# Altium PCB Printer-Pi-Pro_PCB.pcbdoc
Units mil, origin at the board's own origin, x right, y up, seen from the top; angles counter-clockwise.
Board outline 3272.5 x 1815 mil, 2 copper layers (Top Layer, Bottom Layer); 14 components, 16 nets, 72 pads, 12 vias.
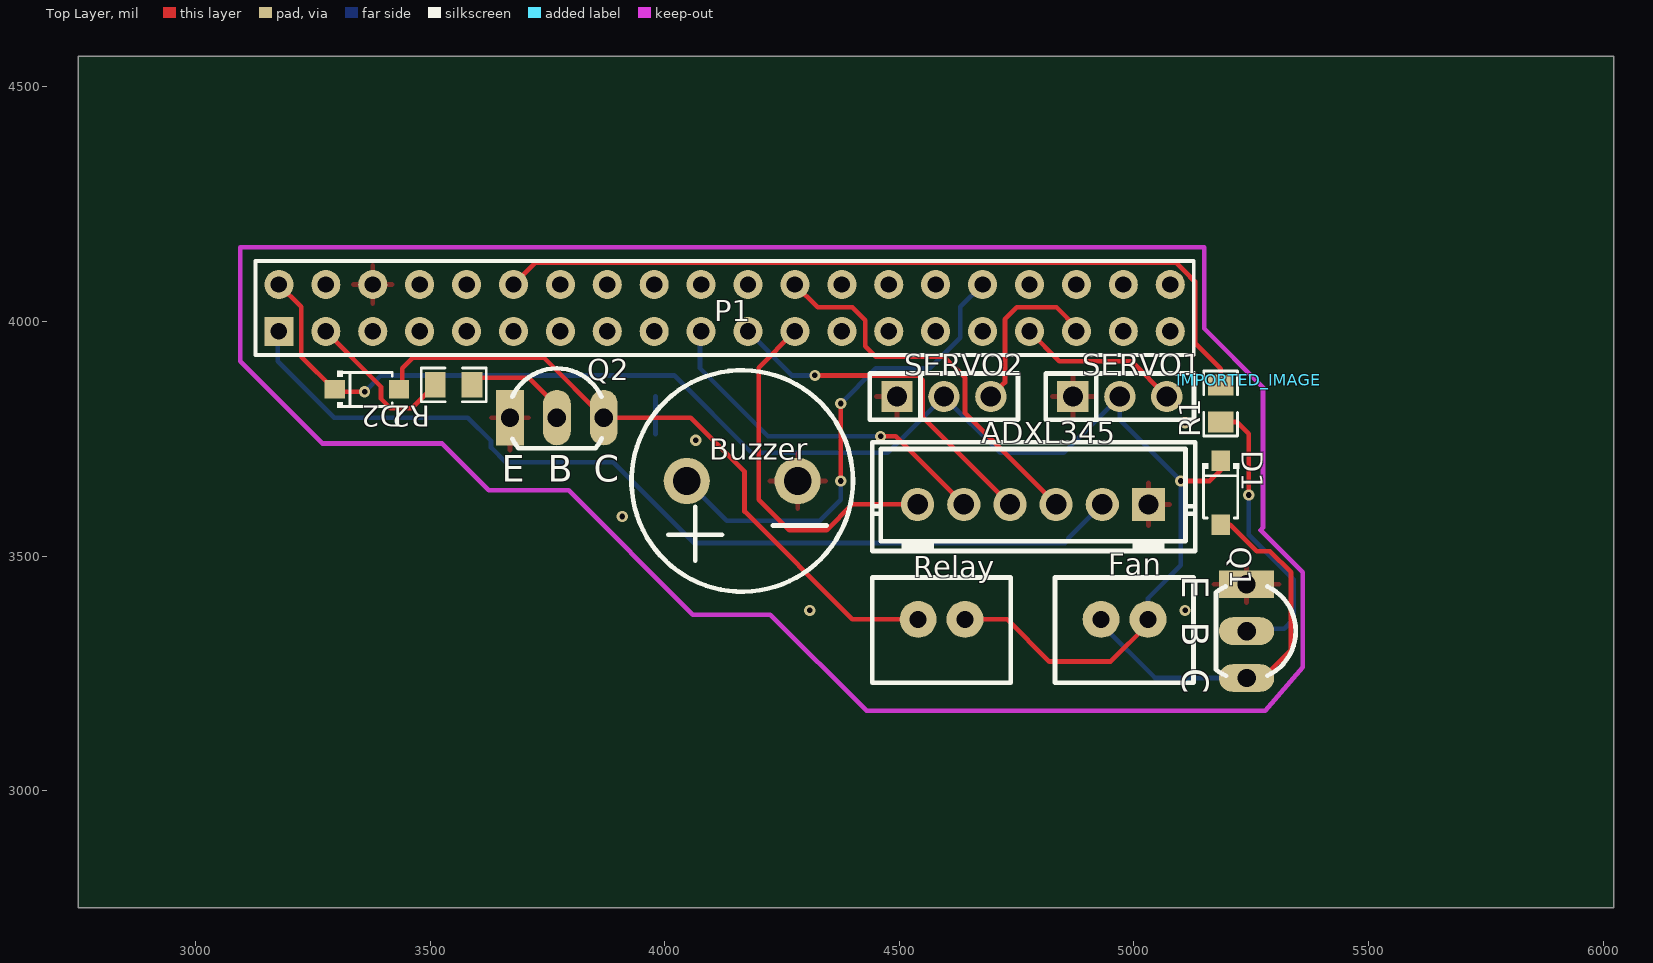
[diagram p0: Top Layer view]
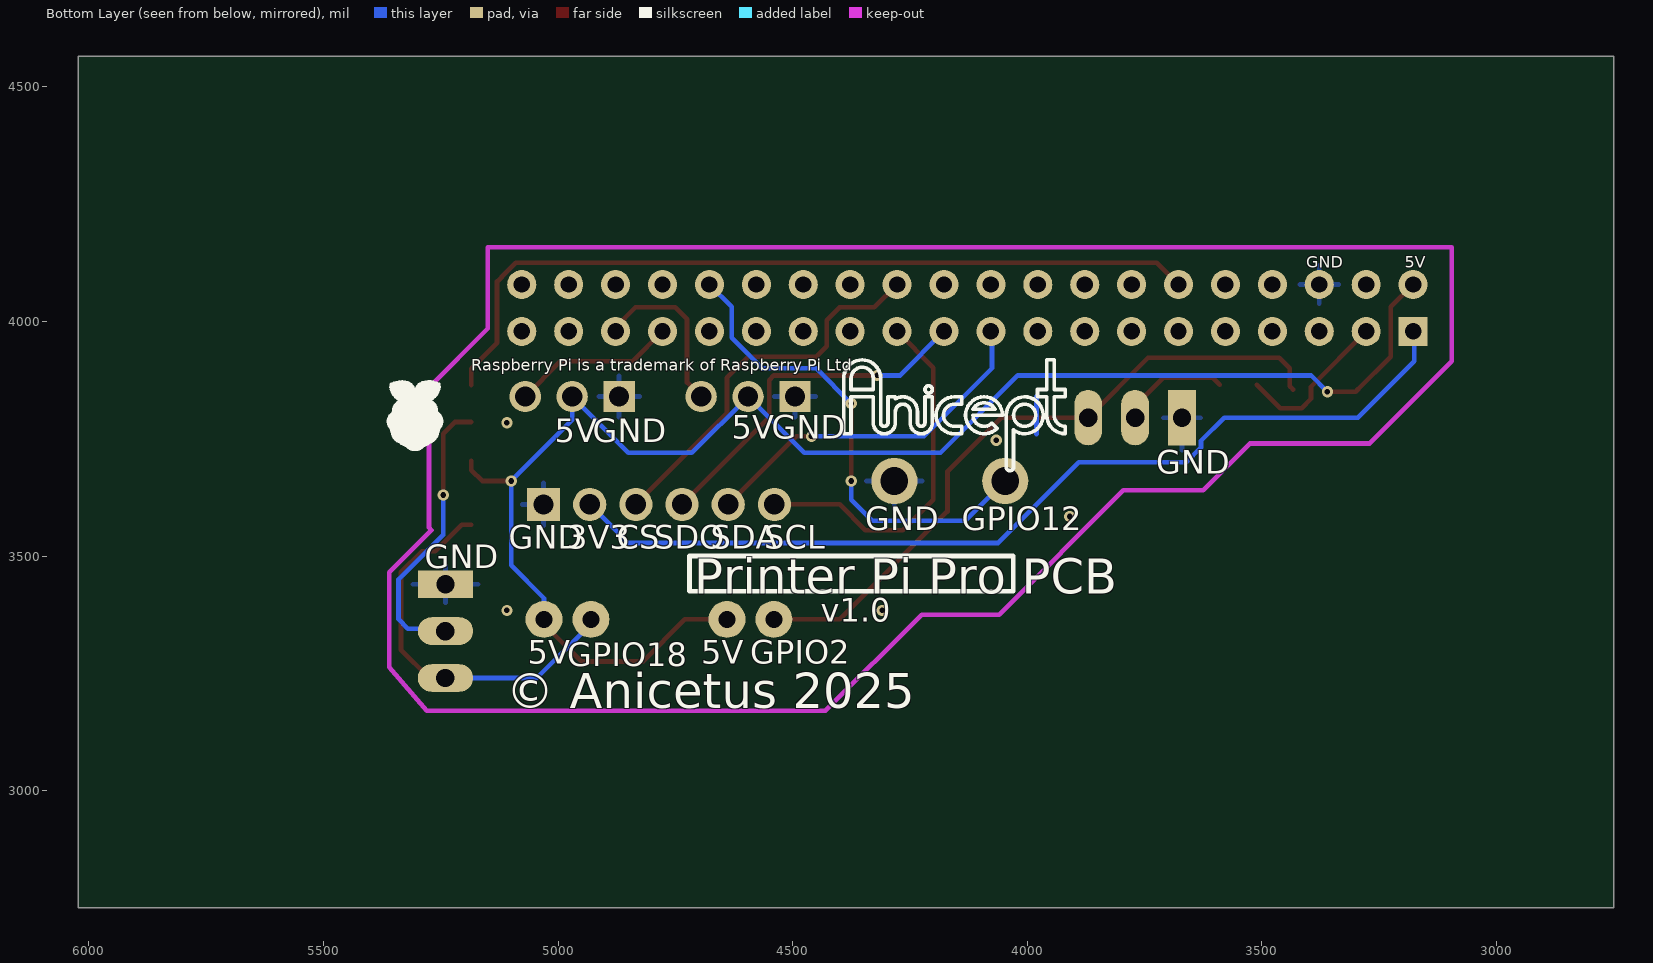
[diagram p1: Bottom Layer view, seen from below]

## Layer stack, top to bottom
Top Layer: signal copper (thickness not stored)
Dielectric: dielectric 12.6, FR-4, Dk 4.8
Bottom Layer: signal copper (thickness not stored)

## Board outline
6022.5,2750 2750,2750 2750,4565 6022.5,4565

## Design rules (kind name [scope] priority, off if disabled: settings)
BoardOutlineClearance copperThickness1oz [All] p0: genericclearance=10 ignorepadtopadclearanceinfootprint=FALSE except(0: Arc-SplitContinuation Track-SplitContinuation SMDPad-SplitContinuation THPad-SplitContinuation Via-SplitContinuation Fill-SplitContinuation Poly-SplitContinuation Region-SplitContinuation Text-SplitContinuation; 6: Track-CutoutEdge SMDPad-CutoutEdge THPad-CutoutEdge Via-CutoutEdge Region-CutoutEdge; 11.8: Track-OutlineEdge SMDPad-OutlineEdge THPad-OutlineEdge Via-OutlineEdge Fill-OutlineEdge Region-OutlineEdge Poly-OutlineEdge Text-OutlineEdge Fill-CutoutEdge)
BoardOutlineClearance copperThickness2oz [All] p0: genericclearance=10 ignorepadtopadclearanceinfootprint=FALSE except(0: Arc-SplitContinuation Track-SplitContinuation SMDPad-SplitContinuation THPad-SplitContinuation Via-SplitContinuation Fill-SplitContinuation Poly-SplitContinuation Region-SplitContinuation Text-SplitContinuation; 6: Track-CutoutEdge SMDPad-CutoutEdge THPad-CutoutEdge Via-CutoutEdge Region-CutoutEdge; 11.8: Track-OutlineEdge SMDPad-OutlineEdge THPad-OutlineEdge Via-OutlineEdge Fill-OutlineEdge Region-OutlineEdge Poly-OutlineEdge Text-OutlineEdge Fill-CutoutEdge)
Clearance copperThickness1oz [(InNet('GND') OR InNet('3V3') OR InNet('$1N1246') OR InNet('$1N1254') OR InNet('$1N1262') OR InNet('$1N1269') OR InNet('BUZZER') OR InNet('$1N1476') OR InNet('+5V') OR InNet('$1N1482') OR InNet('$1N673') OR InNet('$1N1043') OR InNet('RELAY_GPIO') OR InNet('FAN_PWM') OR InNet('$1N779') OR InNet('$1N1048'))] p1: gap=7 ignorepadtopadclearanceinfootprint=FALSE except(4: Track-Track; 6: Track-SMDPad SMDPad-SMDPad Track-THPad SMDPad-THPad THPad-THPad Track-Via SMDPad-Via THPad-Via Via-Via SMDPad-Fill THPad-Fill Via-Fill Fill-Fill Track-Region SMDPad-Region THPad-Region Via-Region Region-Region Track-Poly SMDPad-Poly THPad-Poly Via-Poly Fill-Poly Region-Poly Poly-Poly Track-Text SMDPad-Text THPad-Text Via-Text Fill-Text Region-Text Poly-Text Text-Text; 6.9: Track-Hole SMDPad-Hole THPad-Hole Via-Hole Fill-Hole Region-Hole Poly-Hole Text-Hole Sheet-Hole; 11.8: Track-Fill Fill-Region Track-Sheet SMDPad-Sheet THPad-Sheet Via-Sheet Fill-Sheet Region-Sheet Poly-Sheet Text-Sheet)
Clearance copperThickness2oz [All] p1: gap=7 ignorepadtopadclearanceinfootprint=FALSE except(6: Track-SMDPad SMDPad-SMDPad Track-THPad SMDPad-THPad THPad-THPad Track-Via SMDPad-Via THPad-Via Via-Via SMDPad-Fill THPad-Fill Via-Fill Fill-Fill Track-Region SMDPad-Region THPad-Region Via-Region Region-Region Track-Poly SMDPad-Poly THPad-Poly Via-Poly Fill-Poly Region-Poly Poly-Poly Track-Text SMDPad-Text THPad-Text Via-Text Fill-Text Region-Text Poly-Text Text-Text; 6.9: Track-Hole SMDPad-Hole THPad-Hole Via-Hole Fill-Hole Region-Hole Poly-Hole Text-Hole Sheet-Hole; 8: Track-Track; 11.8: Track-Fill Fill-Region Track-Sheet SMDPad-Sheet THPad-Sheet Via-Sheet Fill-Sheet Region-Sheet Poly-Sheet Text-Sheet)
DiffPairsRouting differentialPair [All] p1: maxuncoupledlength=10 minlimit=6 maxlimit=6 mostfreqgap=6 toplayer_minwidth=5 toplayer_prefwidth=10 toplayer_maxwidth=100 bottomlayer_minwidth=5 bottomlayer_prefwidth=10 bottomlayer_maxwidth=100
PasteMaskExpansion pasteMaskExpansion [All] p1: expansion=0
PlaneConnect innerPlane [All] p1: planeconnectstyle=Relief reliefexpansion=20 reliefentries=4 reliefconductorwidth=10 reliefairgap=10
PolygonConnect copperRegion [All] p1: connectstyle=Relief reliefentries=4 reliefconductorwidth=10 polygonreliefangle="90 Angle" airgapwidth=10
RoutingVias viaSize [All] p1: viastyle="Through Hole" holewidth=12.0078 minholewidth=11.811 maxholewidth=248.0314 width=24.0158 minwidth=19.685 maxwidth=393.7008
SolderMaskExpansion solderMaskExpansion [All] p1: useseparateexpansions=TRUE expansion=2 expansionbottom=2
Width copperThickness1oz [All] p1: maxlimit=100 minlimit=5 preferedwidth=10
Width copperThickness2oz [All] p1: maxlimit=100 minlimit=8 preferedwidth=10

## Components (designator, comment, footprint, x,y, rotation, side; value= is the part's Value field where it differs from the comment)
ADXL345 "B6B-XH-A-GU" CONN-TH_6P-P2.50_C9900020524 4785,3610 r0 top
Buzzer "YS-MBZ12085C05R42" BUZ-TH_BD12.0-P6.00-D0.9-RD 4165,3660 r180 top
D1 "1N4148W_C81598" SOD-123F_L2.7-W1.6-LS3.8-RD 5185,3635 r270 top
D2 "1N4148W_C81598" SOD-123F_L2.7-W1.6-LS3.8-RD 3365,3855 r0 top
Fan "B2B-XH-A(LF)(SN)" "JST-XH 2p" 5030,3365 r180 top
IMPORTED_IMAGE "IMPORTED_IMAGE" IMPORTED_IMAGE 5245,3875 r0 top
P1 "2.54-2*20" HDR-20X2/2.54 4077.39,4078.71 r0 top
Q1 "2N2222A_C5330385" 2N2222A 5240,3340 r270 top
Q2 "2N2222A_C5330385" 2N2222A 3770,3795 r0 top
R1 "ARG05FTC5000" R0805 5185,3825 r90 top
R2 "ARG05FTC5000" R0805 3550,3865 r180 top
Relay "B2B-XH-A(LF)(SN)" "JST-XH 2p" 4640,3365 r180 top
SERVO1 "PZ254V-11-03P" HDR-TH_203S-Y-1X03PG 4970,3840 r0 top
SERVO2 "PZ254V-11-03P" HDR-TH_203S-Y-1X03PG 4595,3840 r0 top

## Footprints (in the part's own frame and the unit in brackets; to place one, negate y for a bottom-side part, rotate by r counter-clockwise, add the part's x,y. Pads: shape width x height; smd on the part's side, far side on the other; paste and mask are expansions set on the pad)
2N2222A [mm]
  rect 1.5x3 hole 1: 1(-2.54,0)
  oval 1.5x3 hole 1: 2(0,0.001) 3(2.54,0.001)
  silkscreen extent -2.41,-1.65 2.42,2.67
BUZ-TH_BD12.0-P6.00-D0.9-RD [mm]
  round 2.5 hole 1.5: 1(-3,0) 2(3,0)
  silkscreen extent -5.99,-5.99 5.99,5.99
CONN-TH_6P-P2.50_C9900020524 [mm]
  rect 1.8x1.8 hole 1.1: 1(6.251,-0.001)
  round 1.8 hole 1.1: 2(3.749,0.001) 3(1.249,0.001) 4(-1.251,0.001) 5(-3.751,0.001) 6(-6.251,0.001)
  silkscreen extent -8.7,-2.52 8.79,3.37
HDR-20X2/2.54 [mil]
  rect 62x62 hole 35: 1(-900,-100)
  round 62 hole 35: 2(-900,0) 3(-800,-100) 4(-800,0) 5(-700,-100) 6(-700,0) 7(-600,-100) 8(-600,0) 9(-500,-100) 10(-500,0) 11(-400,-100) 12(-400,0) 13(-300,-100) 14(-300,0) 15(-200,-100) 16(-200,0) 17(-100,-100) 18(-100,0) 19(0,-100) 20(0,0) 21(100,-100) 22(100,0) 23(200,-100) 24(200,0) 25(300,-100) 26(300,0) 27(400,-100) 28(400,0) 29(500,-100) 30(500,0) 31(600,-100) 32(600,0) 33(700,-100) 34(700,0) 35(800,-100) 36(800,0) 37(900,-100) 38(900,0) 39(1000,-100) 40(1000,0)
  silkscreen extent -950,-150 1050,50
HDR-TH_203S-Y-1X03PG [mm]
  rect 1.7x1.7 hole 1.1: 1(-2.54,0)
  round 1.7 hole 1.1: 2(0,0) 3(2.54,0)
  silkscreen extent -4.01,-1.25 4.01,1.25
IMPORTED_IMAGE [mil]
"JST-XH 2p" [mm]
  round 2 hole 0.914: 1(0,0) 2(2.54,0)
  silkscreen extent -2.47,-2.27 5.03,3.43
R0805 [mm]
  rect 1.133x1.377 smd: 1(-1,0) 2(1,0)
  silkscreen extent -1.76,-0.92 1.76,0.92
SOD-123F_L2.7-W1.6-LS3.8-RD [mm]
  rect 1.1x1 smd: 1(-1.735,0) 2(1.735,0)
  silkscreen extent -1.6,-1 1.38,1

## Via types
v1: diameter 24.02, hole 12.01, Top Layer to Bottom Layer, 12 vias

## Nets (pads, with @x,y where several pads share a name; then routed paths per layer and width w, separated by ;. In a path a pad name is that pad's centre, name@x,y a point inside that pad or via, vN(x,y) a via of type N, cw(c..) or ccw(c..) an arc to the next point about the centre after c; other vN are vias at no path point)
3V3: ADXL345.2 P1.1 | length 2026.3
  Bottom Layer w10: P1.1 3175,3976.32 3175,3915 3295,3795 3580,3795 3629.49,3745.51 3629.49,3731.39 3660.87,3700 3890,3700 4062.07,3527.93 4852.93,3527.93 4860,3535 4860,3537.44 ADXL345.2
$1N673: D1.2 Fan.2 Q1.3 | length 834.6
  Top Layer w10: D1.2 5205,3566.7 5261.69,3510 5290,3510 5335,3465 5335,3300 5275,3240 Q1.3
  Bottom Layer w10: Fan.2@4930,3355 5045,3240 Q1.3
$1N779: Q1.2 R1.1 | length 615.7
  Top Layer w10: R1.1 5220,3785.63 5245,3760.63 v1(5245,3630)
  Bottom Layer w10: Q1.2 5245.02,3345 5320,3345 5340,3365 5340,3450 5245,3545 v1(5245,3630)
$1N1043: D2.2 Q2.3 Relay.2 | length 1437.8
  Top Layer w10: D2.2 3440,3861.7 3440,3900 3462.5,3922.5 3742.52,3922.5 Q2.3 4054.98,3795.02 4170,3680 4170,3595 4400,3365 Relay.2
$1N1048: Q2.2 R2.1 | length 236.7
  Top Layer w10: R2.1 3604.37,3880 3710,3880 3770,3820 Q2.2
$1N1246: ADXL345.3 P1.24 | length 827.5
  Top Layer w10: P1.24 4326.1,4030 4400,4030 4427.5,4002.5 4427.5,3947.5 4450,3925 4595,3925 4640,3880 4640,3804.2 ADXL345.3
$1N1254: ADXL345.4 P1.21 | length 757.5
  Top Layer w10: v1(4320,3885) 4540,3885 4550,3875 4550,3795.77 ADXL345.4
  Bottom Layer w10: P1.21 4271.1,3885 v1(4320,3885)
$1N1262: ADXL345.5 P1.19 | length 762.1
  Top Layer w10: v1(4460,3755) 4492.35,3755 ADXL345.5
  Bottom Layer w10: P1.19 4075,3976.32 4075,3900 4220,3755 v1(4460,3755)
$1N1269: ADXL345.6 P1.23 | length 779.4
  Top Layer w10: P1.23 4200,3901.32 4200,3620 4265,3555 4345,3555 4400.03,3610.03 ADXL345.6
$1N1476: P1.33 SERVO1.3 | length 350.1
  Top Layer w10: P1.33 4841.1,3915 4995,3915 SERVO1.3
$1N1482: P1.35 SERVO2.3 | length 366.6
  Top Layer w10: SERVO2.3 4725,3870 4725,4005 4750,4030 4835,4030 4877.39,3987.61 P1.35
+5V: D1.1 D2.1 Fan.1 P1.2 Relay.1 SERVO1.2 SERVO2.2 | length 3325.9
  Top Layer w10: P1.2 3225,4031.1 3225,3925 D2.1@3295,3855 ; D2.1 D2.1@3295,3855 ; v1(3360,3850) 3300,3850 D2.1@3295,3855 ; Relay.1 4730,3365 4820,3275 4950,3275 Fan.1@5030,3355 ; v1(5100,3660) 5161.69,3660 5185,3683.3 D1.1
  Bottom Layer w10: v1(3360,3850) 3395,3885 4020,3885 4184.8,3720.2 4475.2,3720.2 SERVO2.2 4715,3720 4850,3720 SERVO1.2 4970,3790 v1(5100,3660) 5100,3480 5030,3410 Fan.1@5030,3355
BUZZER: Buzzer.2 P1.32 | length 1033.3
  Top Layer w10: v1(4375,3660) v1(4375,3825)
  Bottom Layer w10: Buzzer.2 4131.89,3575 4330,3575 4375,3620 v1(4375,3660) ; v1(4375,3825) 4450,3900 4565,3900 4630,3965 4630,4031.32 P1.32
FAN_PWM: P1.12 R1.2 | length 1732
  Top Layer w10: P1.12 3723.68,4125 5090,4125 5094.31,4120.69 5094.78,4120.69 5119.37,4096.1 5119.37,4095.63 5130,4085 5130,3954.37 5185,3899.37 R1.2
GND: ADXL345.1 Buzzer.1 P1.6 Q1.1 Q2.1 SERVO1.1 SERVO2.1
  other v1: 4309.1,3384.1 5109.1,3384.1 3909.1,3584.1 4066.05,3747.03 5109.1,3784.1
RELAY_GPIO: P1.3 R2.2 | length 337.1
  Top Layer w10: P1.3 3395,3861.1 3395,3835 3415,3815 3460.63,3815 R2.2
pads on no net: P1.4 P1.5 P1.7 P1.8 P1.9 P1.10 P1.11 P1.13 P1.14 P1.15 P1.16 P1.17 P1.18 P1.20 P1.22 P1.25 P1.26 P1.27 P1.28 P1.29 P1.30 P1.31 P1.34 P1.36 P1.37 P1.38 P1.39 P1.40
copper on no net: | length 80
  Bottom Layer w10: 3980,3760 3980,3840

## Polygon pours and split planes (outlines as drawn)
GND on Top Layer (solid, remove dead copper, pour order 0): 3020,4275 5460,4275 5460,3080 3020,3080
GND on Bottom Layer (solid, remove dead copper, pour order 2): 3000,4315 5475,4315 5475,3000 3000,3000

## Keep-outs
Board Outline Layer:
  lines w10: 3095,3915 3270,3740 3525,3740 3625,3640 3795,3640 4060,3375 4225,3375 4430,3170 5279.69,3170 5360,3263.09 5360,3465 5270,3555 5275,3560 5275,3860 5150,3985 5150,4158.44 3095,4158.44 3095,3915

## Silkscreen, mask and mechanical layers (free items; w line width, h text height)
Bottom Silkscreen Layer:
  circle w7.87: c4005.39,3800 r23.62
  circle w7.87: c4210.12,3855 r7.87
  lines w7.87: 3918.78,3760.63 ccw(c3918.78,3800) 3958.15,3800 3958.15,3839.37 3977.83,3839.37 3977.83,3855.12 3958.15,3855.12 3958.15,3918.11 3942.4,3918.11 3942.4,3855.12 3918.78,3855.12 3918.78,3839.37 3942.4,3839.37 3942.4,3800 cw(c3918.78,3800) 3918.78,3776.38 3918.78,3769.5 3918.78,3760.63 ; 4029.02,3689.76 ccw(c4036.89,3689.76) 4044.76,3689.76 4044.76,3800 ccw(c4005.39,3800) 4029.02,3768.5 4029.02,3689.76 ; 4052.64,3800 cw(c4092.01,3800) 4131.38,3800.02 cw(c4092.01,3800) 4064.18,3772.15 4075.31,3783.29 ccw(c4092.01,3800) 4115.63,3800.01 4052.64,3800 ; 4068.39,3812.6 4115.62,3812.61 ccw(c4092.01,3800) 4068.39,3812.6 ; 4139.25,3760.63 4139.25,3768.5 4139.25,3776.38 4155,3776.38 ccw(c4155,3800) 4155,3823.62 4139.25,3823.62 4139.25,3831.5 4139.25,3839.37 4155,3839.37 cw(c4155,3800) 4155,3760.63 4139.25,3760.63 ; 4202.24,3784.25 ccw(c4225.87,3784.25) 4249.49,3784.25 4249.49,3807.87 cw(c4265.24,3807.87) 4265.24,3823.62 cw(c4265.24,3807.87) 4280.98,3807.87 4280.98,3784.25 ccw(c4304.61,3784.25) 4328.23,3784.25 4328.23,3839.37 4375.47,3839.37 4375.47,3760.63 4391.22,3760.63 4391.22,3878.74 ccw(c4351.85,3878.74) 4351.85,3918.11 ccw(c4351.85,3878.74) 4312.48,3878.74 4312.48,3784.25 cw(c4304.61,3784.25) 4296.73,3784.25 4296.73,3839.37 4280.98,3839.37 4280.98,3835.15 ccw(c4265.24,3807.87) 4265.24,3839.37 ccw(c4265.24,3807.87) 4233.74,3807.87 4233.74,3784.25 cw(c4225.87,3784.25) 4217.99,3784.25 4217.99,3839.37 4202.24,3839.37 4202.24,3784.25 ; 4328.23,3855.12 4375.47,3855.12 4375.47,3878.74 ccw(c4351.85,3878.74) 4351.85,3902.36 ccw(c4351.85,3878.74) 4328.23,3878.74 4328.23,3855.12
  lines w10: 4030,3425 4720,3425 4720,3500 4030,3500 4030,3425
  text "5V" at 3195,4115 h25
  text "GND" at 3405,4115 h25
  text "Raspberry Pi is a trademark of Raspberry Pi Ltd" at 5185,3895 h25
  text "GND" at 4545,3750 h50
  text "5V" at 4630,3750 h50
  text "GND" at 4925.65,3742.68 h50
  text "5V" at 5007.14,3742.68 h50
  text "GND" at 3725,3675 h50
  text "GPIO12" at 4140,3555 h50
  text "GND" at 4345,3555 h50
  text "SCL" at 4560,3515 h50
  text "SDA" at 4675,3515 h50
  text "SDO" at 4795,3515 h50
  text "CS" at 4875,3515 h50
  text "3V3" at 4980,3515 h50
  text "GND" at 5105,3515 h50
  text "GND" at 5284.74,3473.61 h50
  text "Printer Pi Pro PCB" at 4710,3420 h75
  text "v1.0" at 4440,3360 h50
  text "GPIO2" at 4590,3270 h50
  text "5V" at 4695,3270 h50
  text "5V" at 5065,3270 h50
  text "GPIO18" at 4980,3265 h50
  text "© Anicetus 2025" at 5110,3175 h75

## Text inside footprints (layer, text, board x,y; h text height)
Q1: Top Silkscreen Layer "E" at 5103.11,3457.94 h57.17 r270; Top Silkscreen Layer "B" at 5103.11,3359.44 h57.17 r270; Top Silkscreen Layer "C" at 5103.11,3260.94 h57.17 r270
Q2: Top Silkscreen Layer "E" at 3652.06,3658.11 h57.17; Top Silkscreen Layer "B" at 3750.56,3658.11 h57.17; Top Silkscreen Layer "C" at 3849.06,3658.11 h57.17